# EAGLE board analog_inputs_long (EAGLE 9.0.1)
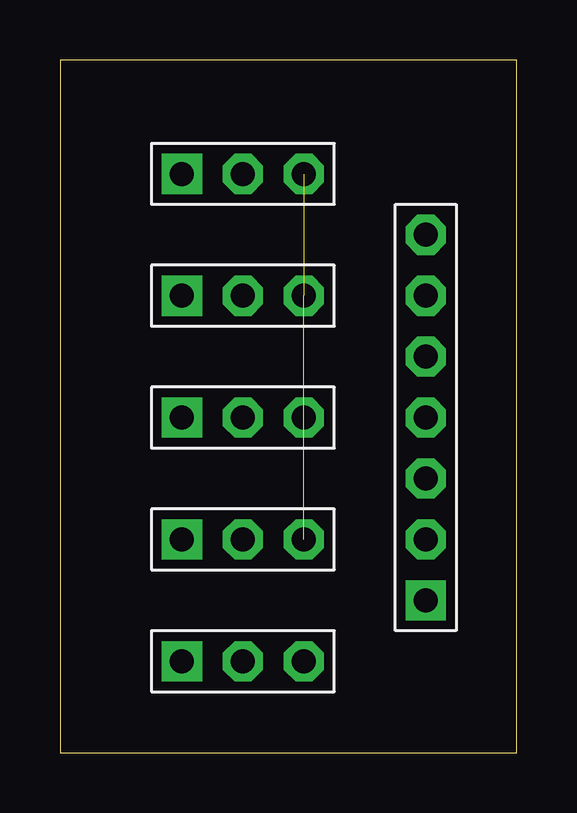
[diagram p0: board, top side]
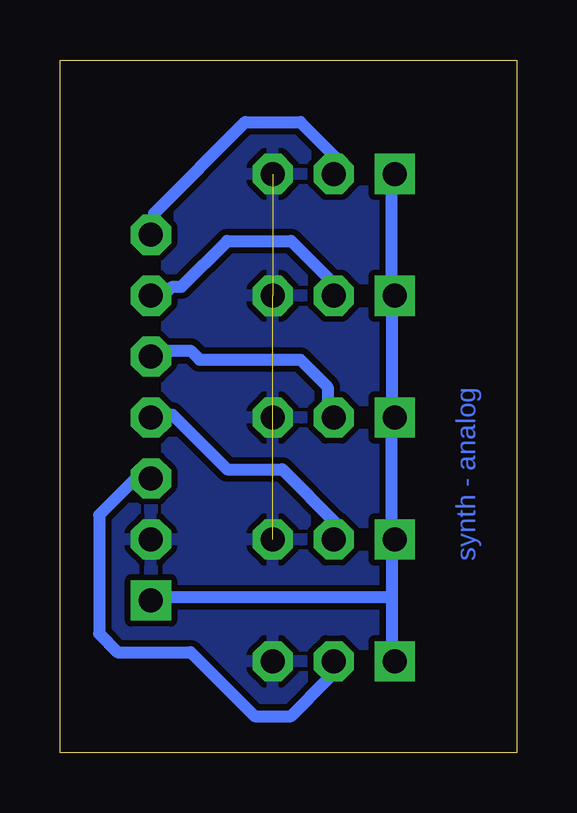
[diagram p1: board, bottom side, seen from below]

Size 19.03 x 28.88 mm. Coordinates in mm from the lower left corner, seen from the top.
Outline: 0,0 19.03,0 19.03,28.88 0,28.88 0,0
Copper layers (1*16): Top 0.035mm / dielectric 1.5mm / Bottom 0.035mm
Design rules "default": minimum track width 6mil, minimum drill 0.35mm, track to track 6mil, track to pad 6mil, pad to pad 6mil, via to via 6mil, smd to smd 6mil, copper to edge 40mil, drill to drill 6mil, minimum pad ring 10mil, minimum via ring 8mil, stop-mask expansion 4mil, vias tented up to drill 0mil, thermal gap 10mil
Net classes: 0 default: width 0.508 mm, clearance 0.254 mm

## Footprints (pad centres in the part's own frame; a part is rotated, then mirrored left to right if it is on the bottom)
3-PIN-HEADER = drill 1 pad 1.676 square: P$1 -2.54,0 | drill 1 pad 1.676 octagon: P$2 0,0; P$3 2.54,0
7-PIN-HEADER = drill 1 pad 1.676 square: P$1 -7.62,0 | drill 1 pad 1.676 octagon: P$2 -5.08,0; P$3 -2.54,0; P$4 0,0; P$5 2.54,0; P$6 5.08,0; P$7 7.62,0

## Placement (x,y rotation side)
U$1  3-PIN-HEADER  [3-PIN-HEADER]  7.62,3.81 0 top
U$2  3-PIN-HEADER  [3-PIN-HEADER]  7.62,8.89 0 top
U$3  3-PIN-HEADER  [3-PIN-HEADER]  7.62,13.97 0 top
U$4  3-PIN-HEADER  [3-PIN-HEADER]  7.62,19.05 0 top
U$5  3-PIN-HEADER  [3-PIN-HEADER]  7.62,24.13 0 top
U$8  7-PIN-HEADER  [7-PIN-HEADER]  15.24,13.97 90 top

## Library data of the parts
U$1-U$5 U$8 = mask_lbr

## Nets
A_IN2: U$2.P$2 U$8.P$4
A_IN3: U$3.P$2 U$8.P$5
A_IN4: U$4.P$2 U$8.P$6
A_WHAM: U$5.P$2 U$8.P$7
ANALOG_ACTIVE: U$1.P$1 U$2.P$1 U$3.P$1 U$4.P$1 U$5.P$1 U$8.P$1
GND: U$1.P$3 U$2.P$3 U$3.P$3 U$4.P$3 U$5.P$3 U$8.P$2
VOL_RD: U$1.P$2 U$8.P$3

## Tracks (layer width: path | path; a pad name or v marks a point on that pad's centre or on a via)
A_IN2
  Bottom 0.508: U$2.P$2 7.49,9.14 7.49,9.52 9.78,11.81 12.07,11.81 14.35,14.1 15.11,14.1 U$8.P$4
A_IN3
  Bottom 0.508: U$3.P$2 7.87,14.1 7.87,15.24 9.02,16.38 13.21,16.38 13.59,16.76 15.11,16.76 U$8.P$5
A_IN4
  Bottom 0.508: U$8.P$6 14.73,19.05 14.35,19.43 13.97,19.43 12.07,21.34 9.4,21.34 7.87,19.81 7.87,19.05 U$4.P$2
A_WHAM
  Bottom 0.508: U$5.P$2 7.49,24.38 7.49,24.76 9.02,26.29 11.3,26.29 15.11,22.48 15.11,21.72 U$8.P$7
ANALOG_ACTIVE
  Bottom 0.508: 5.21,19.05 5.21,14.1 U$3.P$1 5.21,13.72 5.21,9.14 U$2.P$1 5.21,8.76 5.21,6.48 | 5.21,19.05 5.21,24 U$5.P$1 | 5.21,19.05 U$4.P$1 | 5.21,6.48 5.21,3.81 U$1.P$1 | 5.21,6.48 15.11,6.48 U$8.P$1
GND  (3 unrouted)
  pour Bottom: 0,-10.16 25.4,-10.16 25.4,30.48 0,30.48
VOL_RD
  Bottom 0.508: U$1.P$2 7.87,3.81 7.87,3.05 9.4,1.52 10.92,1.52 13.59,4.19 16.64,4.19 17.4,4.95 17.4,9.91 15.49,11.81 15.11,11.43 U$8.P$3

## Text on the board
Bottom: synth - analog